# EAGLE board PowerSupplyPCB (EAGLE 7.2.0)
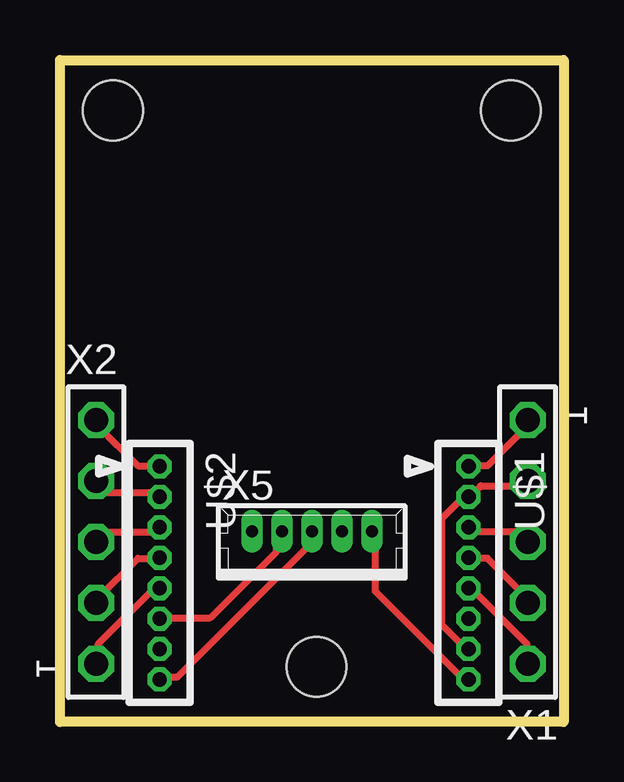
[diagram p0: board, top side]
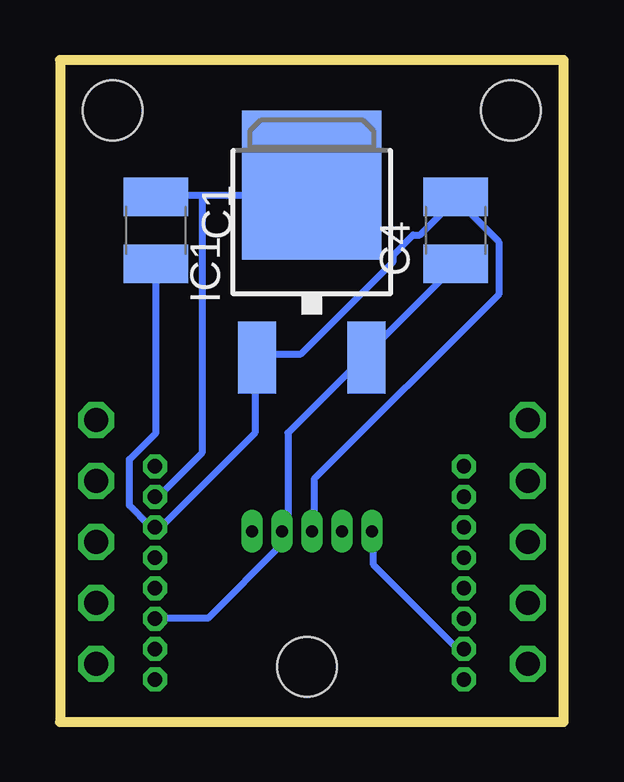
[diagram p1: board, bottom side, seen from below]

Size 21 x 27.6 mm. Coordinates in mm from the lower left corner, seen from the top.
Outline: 0,27.6 21,27.6 21,0 0,0 0,27.6
Copper layers (1*16): Top 0.035mm / dielectric 1.5mm / Bottom 0.035mm
Design rules "PCB-POOL Standard *": minimum track width 0.3mm, minimum drill 0.3mm, track to track 0.25mm, track to pad 0.25mm, pad to pad 0.25mm, via to via 0.25mm, smd to smd 0.25mm, copper to edge 0.3mm, drill to drill 0.2mm, minimum pad ring 0.2mm, minimum via ring 0.15mm, stop-mask expansion 0.075mm, vias tented up to drill 12mil, thermal gap 0.2mm
Holes 2.5 mm at 18.8,25.5 10.7,2.3 2.2,25.5

## Footprints (pad centres in the part's own frame; a part is rotated, then mirrored left to right if it is on the bottom)
C1210 = smd 1.6 x 2.7: 1 -1.4,0; 2 1.4,0
DPACK = smd 1.6 x 3: 1 -2.28,-4.8; 3 2.28,-4.8 | smd 5.8 x 6.2: 4 0,2.38
M52-8PIN-HOLE = drill 0.6 octagon: 1 -10.795,1.27; 2 -9.525,1.27; 3 -8.255,1.27; 4 -6.985,1.27; 5 -5.715,1.27; 6 -4.445,1.27; 7 -3.175,1.27; 8 -1.905,1.27
TSW-105-02-S-S = drill 1 pad 1.5 octagon: 1 5.08,0; 2 2.54,0; 3 0,0; 4 -2.54,0; 5 -5.08,0
53047-05 = drill 0.5 pad 0.698 long: 1 2.5,0.45; 2 1.25,0.45; 3 0,0.45; 4 -1.25,0.45; 5 -2.5,0.45

## Placement (x,y rotation side)
C1  10u  [C1210]  17,20.5 270 bottom
C4  100n  [C1210]  4.5,20.5 90 bottom
IC1  LM317MABDT  [DPACK]  10.5,20 0 bottom
U$1  1X08HOLE  [M52-8PIN-HOLE]  15.77,-0.14 270 top
U$2  1X08HOLE  [M52-8PIN-HOLE]  2.89,-0.14 270 top
X1  TSW-105-02-S-S  [TSW-105-02-S-S]  19.5,7.5 90 top
X2  TSW-105-02-S-S  [TSW-105-02-S-S]  1.5,7.5 270 top
X5  53047-05  [53047-05]  10.5,7.5 0 top

## Library data of the parts
C1 C4 = rcl
IC1 = v-reg
U$1 U$2 = jt-con-harwin
X1 X2 = con-samtec; OC_FARNELL: unknown; OC_NEWARK: unknown
X5 = con-molex; MF: MOLEX; MPN: 53047-0510; OC_FARNELL: 9732861; OC_NEWARK: 38C9901

## Nets
3_3V: C1.1 IC1.4 U$1.2 U$1.7 X1.2
GND: C1.2 C4.2 IC1.1 U$1.3 U$2.8 X1.3 X5.3
ICSPCLK: U$1.5 X1.5
ICSPDAT: U$1.4 X1.4
MCLR: U$1.1 X1.1
RA5: U$2.5 X2.1
RA6: U$2.3 X2.3
RA7: U$2.4 X2.2
RC0-TX: U$2.7 X5.5
RC1-RX: U$2.6 X5.4
RC2: U$2.2 X2.4
RC3: U$2.1 X2.5
VCC_24V: U$1.8 X5.1
VCC_OPAMP: C4.1 IC1.3 U$1.6 X5.2

## Tracks (layer width: path | path; a pad name or v marks a point on that pad's centre or on a via)
3_3V
  Top 0.3: U$1.7 17,3.25 16.73,3.25 15.9,4.07 15.9,8.48 17,9.57 U$1.2 17.27,9.57 17.55,9.85 19.48,9.85 X1.2
  Bottom 0.3: 15.07,21.95 10.95,21.95 10.68,22.23 IC1.4 | 15.07,21.95 17,21.95 C1.1 | 15.07,21.95 15.07,11.23 16.73,9.57 17,9.57 U$1.2
GND
  Top 0.3: U$1.3 17.27,7.93 19.2,7.93 19.48,7.65 X1.3 | X5.3 10.4,7.93 10.4,7.38 4.9,1.88 4.35,1.88 U$2.8
  Bottom 0.3: C1.2 17,12.05 18.1,10.95 18.1,9.02 17.27,8.2 U$1.3 17,8.2 16.73,8.2 12.88,12.05 12.88,15.07 IC1.1 12.6,15.35 10.95,15.35 7.1,19.2 7.1,19.48 6.28,20.3 6,20.3 4.62,21.67 C4.2 4.35,21.67 2.7,20.02 2.7,17.82 10.4,10.12 10.4,8.2 X5.3
ICSPCLK
  Top 0.3: U$1.5 17.27,5.45 19.48,3.25 19.48,2.43 X1.5
ICSPDAT
  Top 0.3: U$1.4 17.27,6.82 17.82,6.82 19.48,5.18 X1.4
MCLR
  Top 0.3: U$1.1 17.27,10.68 17.82,10.68 19.48,12.32 X1.1
RA5
  Top 0.3: U$2.5 4.08,5.45 3.8,5.45 1.6,3.25 1.6,2.43 X2.1
RA6
  Top 0.3: U$2.3 4.08,7.93 1.88,7.93 1.6,7.65 X2.3
RA7
  Top 0.3: U$2.4 4.08,6.82 3.25,6.82 1.6,5.18 X2.2
RC0-TX
  Bottom 0.3: X5.5 7.92,7.93 7.92,6.55 4.35,2.97 U$2.7
RC1-RX
  Top 0.3: X5.4 9.03,7.93 9.03,7.1 6.28,4.35 4.35,4.35 U$2.6
RC2
  Top 0.3: U$2.2 4.08,9.57 1.88,9.57 1.6,9.85 X2.4
RC3
  Top 0.3: U$2.1 4.08,10.68 3.25,10.68 1.6,12.32 X2.5
VCC_24V
  Top 0.3: X5.1 13.15,7.93 13.15,5.45 17,1.6 U$1.8
VCC_OPAMP
  Bottom 0.3: U$1.6 17,4.35 14.8,4.35 11.78,7.38 11.78,7.93 X5.2 11.5,8.2 11.5,12.05 8.47,15.07 IC1.3 8.2,15.35 4.62,18.93 C4.1